# EAGLE board Board_5.15.12 (EAGLE 6.2)
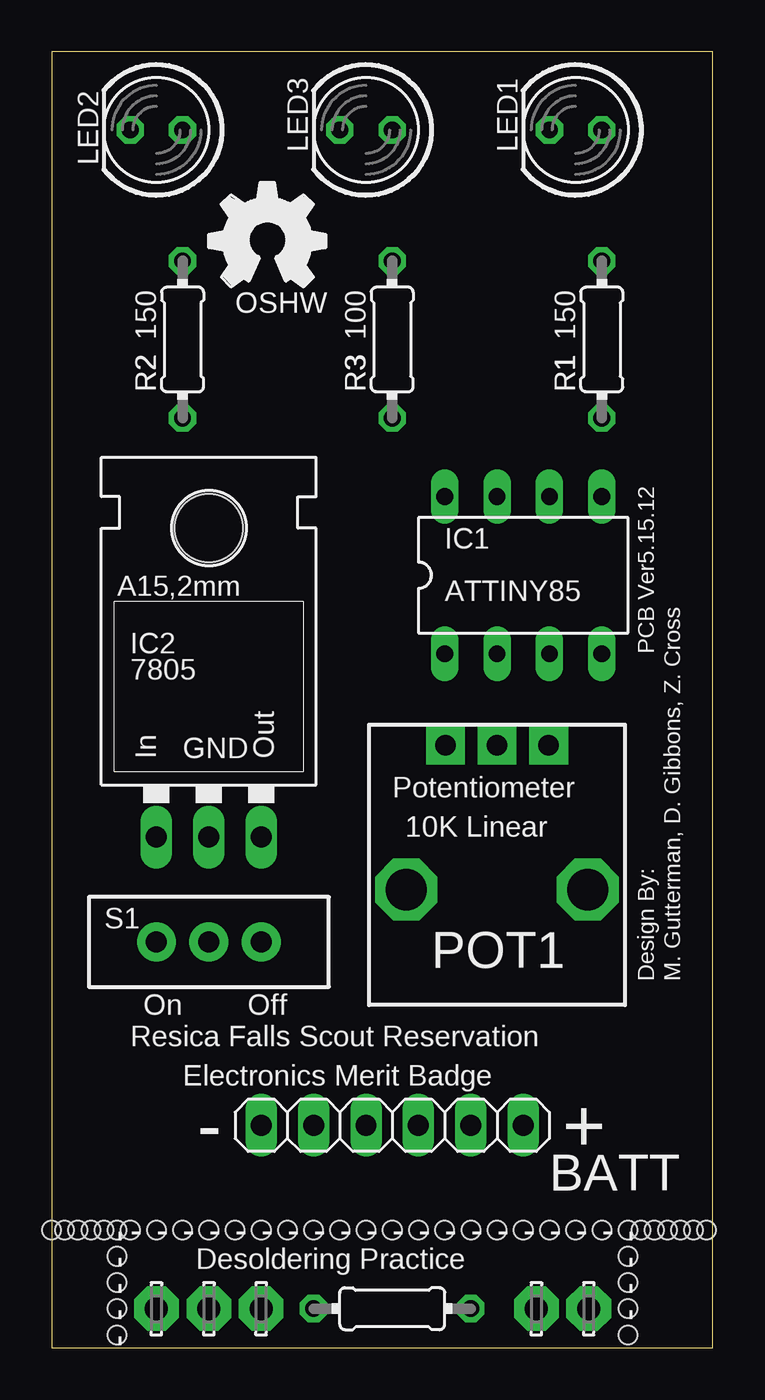
[diagram p0: board, top side]
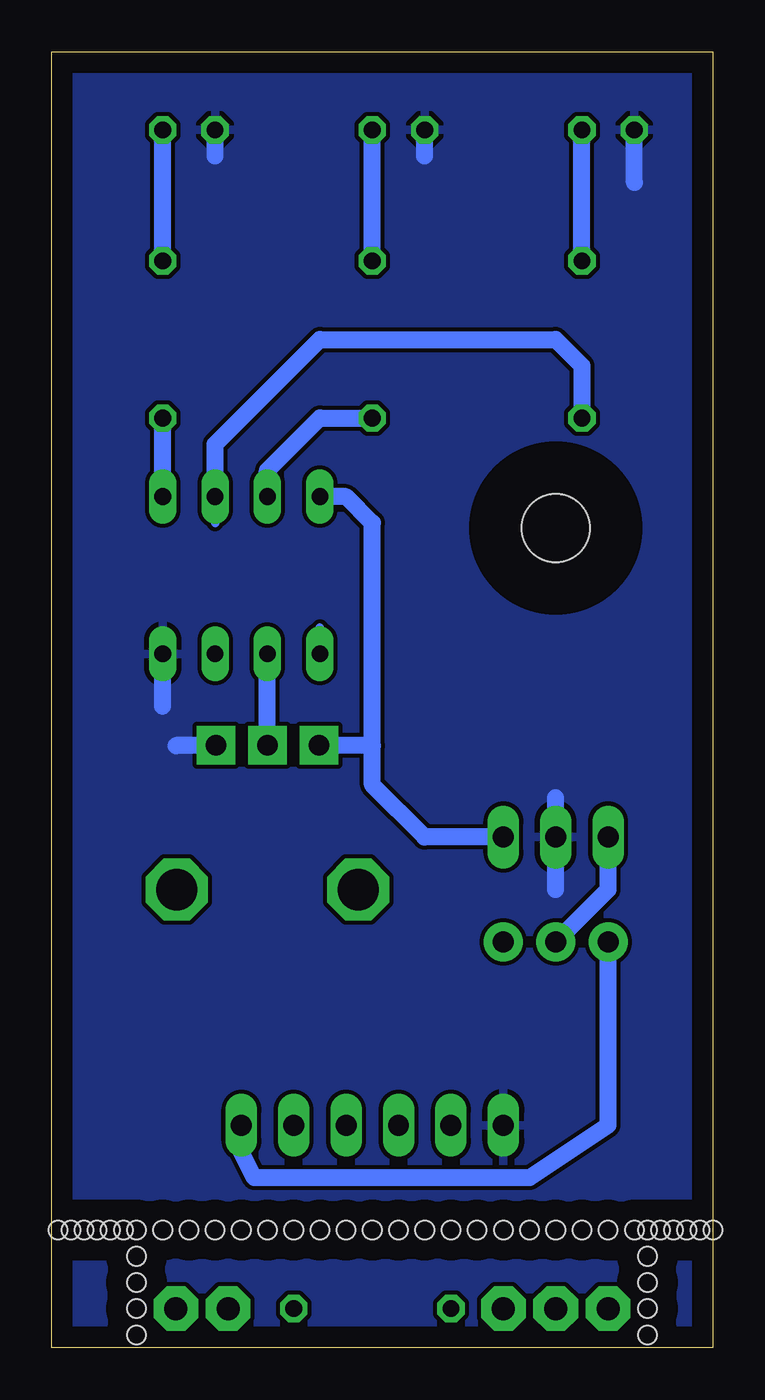
[diagram p1: board, bottom side, seen from below]

Size 32.05 x 62.85 mm. Coordinates in mm from the lower left corner, seen from the top.
Outline: 0,0 32.05,0 32.05,62.85 0,62.85 0,0
Copper layers (1*16): Top 0.035mm / dielectric 1.5mm / Bottom 0.035mm
Design rules: minimum track width 10mil, minimum drill 24mil, track to track 8mil, track to pad 8mil, pad to pad 8mil, via to via 8mil, smd to smd 8mil, copper to edge 40mil, drill to drill 8mil, minimum pad ring 10mil, minimum via ring 8mil, stop-mask expansion 4mil, vias tented up to drill 0mil, thermal gap 10mil
Holes 0.9 mm at 0,5.71 0.64,5.71 1.27,5.71 1.91,5.71 2.54,5.71 3.17,5.71 31.75,5.71 31.11,5.71 30.48,5.71 29.84,5.71 29.21,5.71 28.57,5.71 27.94,5.71 3.17,4.45 3.17,3.17 3.17,1.91 3.17,0.64 27.94,4.45 27.94,3.17 27.94,1.91 27.94,0.64 3.81,5.71 5.08,5.71 6.35,5.71 7.62,5.71 8.89,5.71 10.16,5.71 11.43,5.71 12.7,5.71 13.97,5.71 15.24,5.71 16.51,5.71 17.78,5.71 19.05,5.71 20.32,5.71 21.59,5.71 22.86,5.71 24.13,5.71 25.4,5.71 26.67,5.71

## Footprints (pad centres in the part's own frame; a part is rotated, then mirrored left to right if it is on the bottom)
ALPS_POT = drill 1 pad 1.88 square: P$1 7,-2.5; P$2 7,0; P$3 7,2.5 | drill 2 octagon: P$4 0,-4.4; P$5 0,4.4
78XXL = drill 1.016 long: GND 0,-3.81; IN -2.54,-3.81; OUT 2.54,-3.81 | hole 3.302: 0,11.176
1X06 = drill 1.016 long: 1 -6.35,0; 2 -3.81,0; 3 -1.27,0; 4 1.27,0; 5 3.81,0; 6 6.35,0
LSP11 = drill 1.118 pad 2.159 octagon: MP 0,0
DIL08 = drill 0.813 long: 1 -3.81,-3.81; 2 -1.27,-3.81; 3 1.27,-3.81; 4 3.81,-3.81; 5 3.81,3.81; 6 1.27,3.81; 7 -1.27,3.81; 8 -3.81,3.81
LED5MM = drill 0.813 octagon: A -1.27,0; K 1.27,0
0204/7 = drill 0.813 octagon: 1 -3.81,0; 2 3.81,0
SWITCH-SPDT = drill 1.016 pad 1.88: 1 0,2.54; 2 0,0; 3 0,-2.54

## Placement (x,y rotation side)
10K_LIN_POT  10K Lin Pot  [ALPS_POT]  21.59,22.23 90 top
7805  [78XXL]  7.62,28.57 0 top
E$1  [OSHW_FILLX200_NOTEXT]  7.62,51.44 0 top
E$2  [1X06]  16.51,10.79 0 top
E$3  [OSHW_FILLX200_NOTEXT]  7.62,51.44 0 top
E$5  [LSP11]  5.08,1.91 90 top
E$6  [LSP11]  7.62,1.91 90 top
E$7  [LSP11]  10.16,1.91 90 top
E$8  [LSP11]  26.04,1.91 90 top
E$9  [LSP11]  23.5,1.91 90 top
IC1  ATTiny85  [DIL08]  22.86,37.47 0 top
L1  Yel  [LED5MM]  25.4,59.05 180 top
L2  Yel  [LED5MM]  5.08,59.05 180 top
L3  Wht  [LED5MM]  15.24,59.05 180 top
PRACTICE  [0204/7]  16.51,1.91 0 top
R1  [0204/7]  26.67,48.9 90 top
R2  [0204/7]  6.35,48.9 90 top
R3  [0204/7]  16.51,48.9 90 top
S1  [SWITCH-SPDT]  7.62,19.68 270 top

## Library data of the parts
10K_LIN_POT 7805 S1 = SparkFun
E$1 E$3 = OSHW
E$2 = pinhead
E$5-E$9 = solpad
IC1 = atmel
L1 L2 = led; COLOR: Yellow
L3 = led; COLOR: White
PRACTICE = rcl
R1 = resistor; RESISTANCE: 150 Ohm
R2 = resistor
R3 = resistor; RESISTANCE: 100 Ohm

## Nets
GND: 7805.GND E$2.1 IC1.4 L1.K L2.K L3.K
N$2: 7805.IN S1.2
N$6: L1.A R1.2
N$7: L2.A R2.2
N$8: L3.A R3.2
S$1: IC1.2
S$3: IC1.5 R1.1
S$4: 7805.OUT IC1.8
S$5: E$2.6 S1.3
S$7: IC1.6 R2.1
S$8: IC1.7 R3.1
S$10: E$2.2
S$11: IC1.1

## Tracks (layer width: path | path; a pad name or v marks a point on that pad's centre or on a via)
GND
  Bottom 0.813: 24.13,57.78 L1.K | 13.97,57.78 L3.K | 3.81,56.52 L2.K | 7.62,26.67 7805.GND 7.62,22.23 | 26.67,31.11 IC1.4 | E$2.1 10.16,11.43 | 24.13,29.21 26.04,29.21
  pour Bottom: 0,6.99 31.75,6.99 31.75,62.87 0,62.87
N$2
  Bottom 0.813: 7805.IN 5.08,22.23 S1.2
N$6
  Bottom 0.813: R1.2 L1.A
N$7
  Bottom 0.813: R2.2 L2.A
N$8
  Bottom 0.813: R3.2 L3.A
S$1
  Bottom 0.813: 21.59,29.21 IC1.2
S$2
  pour Bottom: -0.64,5.71 31.75,5.71 31.75,0 -0.64,0
S$3
  Bottom 0.813: IC1.5 R1.1
S$4
  Bottom 0.813: IC1.8 17.78,41.27 16.51,40.01 16.51,29.21 | 7805.OUT 13.97,24.77 16.51,27.3 16.51,29.21 | 16.51,29.21 19.05,29.21
S$5
  Bottom 0.813: S1.3 5.08,10.79 8.89,8.26 22.23,8.26 22.86,9.53 E$2.6
S$7
  Bottom 0.406: IC1.6 24.13,40.01
  Bottom 0.813: IC1.6 24.13,43.81 19.05,48.9 7.62,48.9 6.35,47.62 R2.1
S$8
  Bottom 0.813: IC1.7 21.59,42.55 19.05,45.09 R3.1
S$10
  Bottom 0.406: E$2.2 12.7,12.06
S$11
  Bottom 0.406: 19.05,34.92 IC1.1

## Text on the board
tPlace: LED3 | LED1 | LED2 | OSHW | 150 | 100 | 150 | R2 | R3 | R1 | IC1 | ATTINY85 | IC2 | PCB Ver5.15.12 | 7805 | In | GND | Out | Potentiometer | 10K Linear | S1 | POT1 | Design By: | M. Gutterman, D. Gibbons, Z. Cross | On | Off | Resica Falls Scout Reservation | Electronics Merit Badge | - | + | BATT | - | - | - | - | - | - | - | - | - | - | - | - | - | - | - | - | - | - | - | - | - | - | Desoldering Practice | - | - | - | - | - | -